# Altium PCB MIXR - Power.PcbDoc (part 4 of 4)
Units mm, origin at the board's own origin, x right, y up, seen from the top; angles counter-clockwise.
Board outline 109.43 x 109.43 mm, 2 copper layers (Top Layer, Bottom Layer), stack 1.569 mm thick; 131 components, 82 nets, 420 pads, 247 vias.
Unrouted connection lines stored in the file: 102.
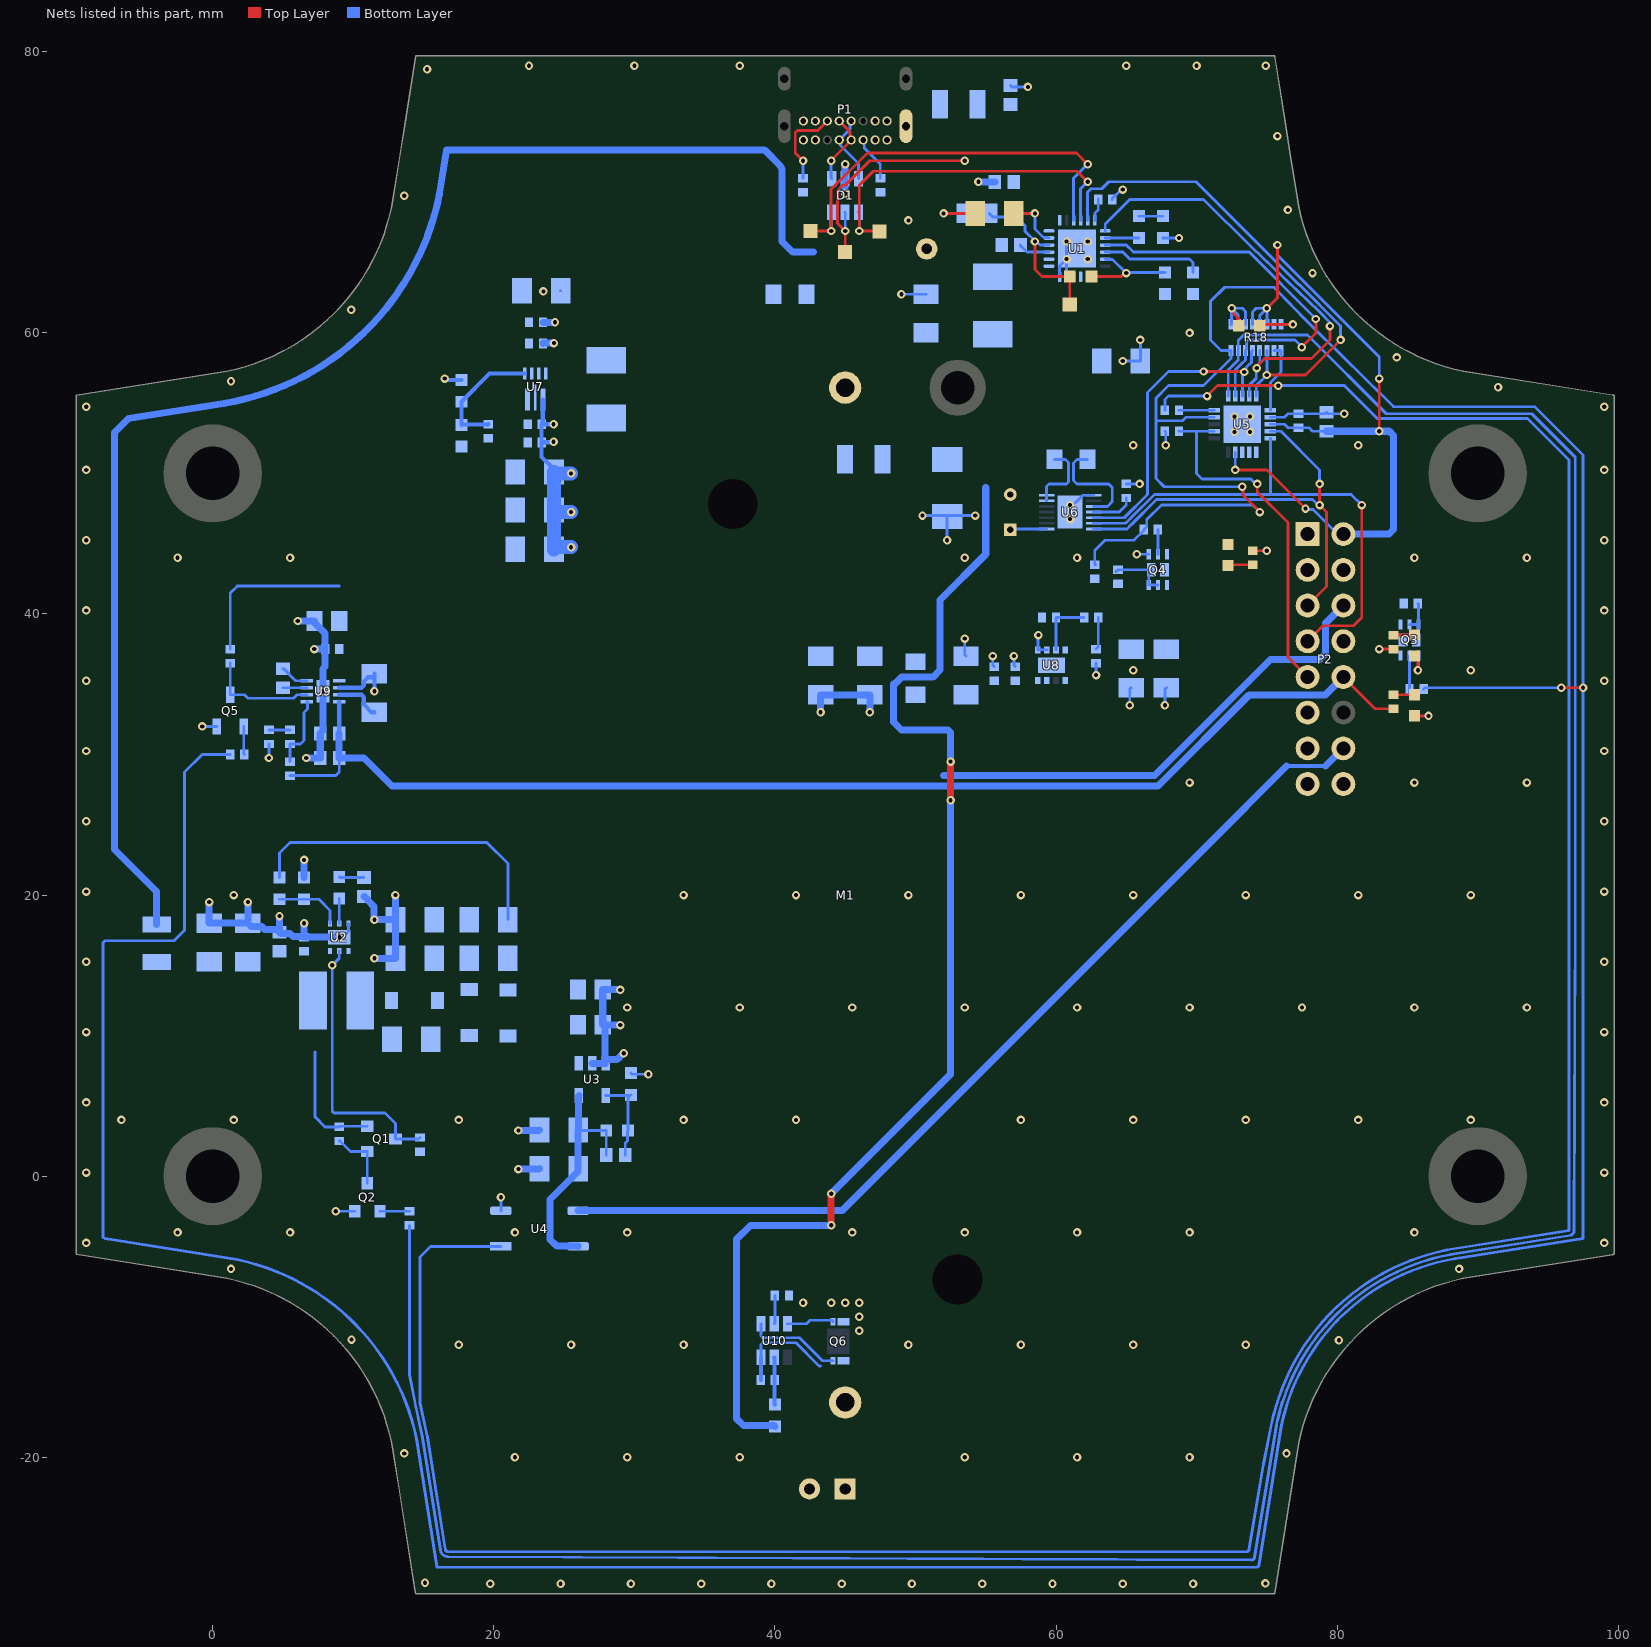
[diagram p2: the nets of this part, all layers, seen from the top]

## Keep-outs (continued)
Keep-Out Layer: (continued)
  lines w0.2: 99.713,55.548 99.712,55.548 99.711,55.549 99.71,55.549 99.709,55.55 ; 99.713,55.548 99.713,-5.549 99.712,-5.549 99.711,-5.55 99.71,-5.55 99.709,-5.55 99.708,-5.551 99.706,-5.551 99.705,-5.552 99.704,-5.552 99.703,-5.553 99.702,-5.553 99.701,-5.553 99.699,-5.554 99.698,-5.554 99.697,-5.555 99.696,-5.555 99.695,-5.555 99.694,-5.556 ; 75.551,79.706 75.551,79.707 75.55,79.708 75.55,79.709 75.549,79.71 75.549,79.712 75.548,79.713 48.95,79.712 41.05,79.712 14.452,79.712 13.654,74.757 13.324,72.672 12.847,69.662 cw(c-2.016,72.016) 0.338,57.153 -9.713,55.548 -9.713,-5.549 0.338,-7.154 cw(c-2.016,-22.017) 12.847,-19.663 13.324,-22.672 14.42,-29.594 75.568,-29.594 77.153,-19.663 cw(c92.016,-22.017) 89.662,-7.154 99.594,-5.581 99.595,-5.58 99.596,-5.58 99.598,-5.58 99.599,-5.58 99.6,-5.58 99.601,-5.579 99.602,-5.579 99.604,-5.579 99.605,-5.579 99.606,-5.579 99.607,-5.578 99.609,-5.578 ; 75.551,79.706 75.551,79.705 ; 75.551,79.705 75.552,79.703 75.552,79.702 75.553,79.701 75.553,79.7 75.554,79.699 75.554,79.698 75.554,79.696 75.555,79.695 75.555,79.694 75.556,79.693 75.556,79.692 ; 75.556,79.692 75.556,79.691 ; 75.556,79.691 75.557,79.689 75.557,79.688 75.558,79.687 75.558,79.686 75.558,79.685 75.559,79.683 75.559,79.682 75.56,79.681 75.56,79.68 75.56,79.679 75.561,79.678 75.561,79.676 75.561,79.675 ; 75.561,79.675 75.562,79.674 ; 75.562,79.674 75.562,79.673 75.562,79.672 75.563,79.67 75.563,79.669 75.563,79.668 75.564,79.667 75.564,79.666 75.565,79.665 75.565,79.663 75.565,79.662 75.566,79.661 75.566,79.66 75.566,79.659 75.567,79.657 75.567,79.656 ; 75.567,79.656 75.567,79.655 ; 75.567,79.655 75.567,79.654 75.568,79.653 75.568,79.651 75.568,79.65 75.569,79.649 75.569,79.648 75.569,79.647 75.57,79.645 75.57,79.644 75.57,79.643 75.571,79.642 75.571,79.641 75.571,79.639 75.571,79.638 75.572,79.637 75.572,79.636 75.572,79.635 75.573,79.633 ; 75.573,79.633 75.573,79.632 ; 75.573,79.632 75.573,79.631 75.573,79.63 75.574,79.628 75.574,79.627 75.574,79.626 75.574,79.625 75.575,79.624 75.575,79.622 75.575,79.621 75.575,79.62 75.576,79.619 75.576,79.618 75.576,79.616 75.576,79.615 75.577,79.614 75.577,79.613 75.577,79.612 75.577,79.61 75.578,79.609 75.578,79.608 75.578,79.607 ; 75.578,79.607 75.578,79.605 ; 75.578,79.605 75.579,79.604 75.579,79.603 75.579,79.602 75.579,79.601 75.579,79.599 75.58,79.598 75.58,79.597 75.58,79.596 75.58,79.594 75.58,79.593 76.346,74.757 76.677,72.672 77.153,69.662 ccw(c92.016,72.016) 89.662,57.153 99.594,55.58 99.595,55.579 99.596,55.579 99.598,55.579 99.599,55.579 99.6,55.579 99.601,55.578 99.602,55.578 99.604,55.578 99.605,55.578 99.606,55.578 99.607,55.577 99.609,55.577 99.61,55.577 99.611,55.577 99.612,55.576 99.613,55.576 99.615,55.576 99.616,55.576 99.617,55.576 99.618,55.575 99.62,55.575 99.621,55.575 99.622,55.575 99.623,55.574 99.624,55.574 99.626,55.574 99.627,55.574 99.628,55.573 99.629,55.573 99.63,55.573 99.632,55.572 99.633,55.572 99.634,55.572 99.635,55.572 ; 99.61,-5.578 99.611,-5.578 99.612,-5.577 99.613,-5.577 99.615,-5.577 99.616,-5.577 99.617,-5.576 99.618,-5.576 99.62,-5.576 99.621,-5.576 99.622,-5.575 99.623,-5.575 99.624,-5.575 99.626,-5.575 99.627,-5.574 99.628,-5.574 99.629,-5.574 99.63,-5.574 99.632,-5.573 99.633,-5.573 99.634,-5.573 99.635,-5.573 99.636,-5.572 99.638,-5.572 99.639,-5.572 99.64,-5.571 99.641,-5.571 99.642,-5.571 99.644,-5.57 99.645,-5.57 99.646,-5.57 99.647,-5.57 99.648,-5.569 99.65,-5.569 99.651,-5.569 99.652,-5.568 99.653,-5.568 99.654,-5.568 99.656,-5.567 99.657,-5.567 99.658,-5.567 ; 99.609,-5.578 99.61,-5.578 ; 99.635,55.572 99.636,55.571 ; 99.636,55.571 99.638,55.571 99.639,55.571 99.64,55.57 99.641,55.57 99.642,55.57 99.644,55.57 99.645,55.569 99.646,55.569 99.647,55.569 99.648,55.568 99.65,55.568 99.651,55.568 99.652,55.567 99.653,55.567 99.654,55.567 99.656,55.567 99.657,55.566 99.658,55.566 99.659,55.565 99.66,55.565 99.662,55.565 99.663,55.565 99.664,55.564 99.665,55.564 99.666,55.564 99.668,55.563 99.669,55.563 99.67,55.562 99.671,55.562 99.672,55.562 99.674,55.561 99.675,55.561 99.676,55.561 99.677,55.56 99.678,55.56 99.679,55.56 99.681,55.559 99.682,55.559 99.683,55.558 99.684,55.558 99.685,55.558 99.687,55.557 99.688,55.557 99.689,55.557 99.69,55.556 99.691,55.556 99.692,55.555 ; 99.659,-5.566 99.66,-5.566 99.662,-5.566 99.663,-5.565 99.664,-5.565 99.665,-5.565 99.666,-5.564 99.668,-5.564 99.669,-5.564 99.67,-5.563 99.671,-5.563 99.672,-5.563 99.674,-5.562 99.675,-5.562 99.676,-5.562 ; 99.658,-5.567 99.659,-5.566 ; 99.677,-5.561 99.678,-5.561 99.679,-5.56 99.681,-5.56 99.682,-5.56 99.683,-5.559 99.684,-5.559 99.685,-5.559 99.687,-5.558 99.688,-5.558 99.689,-5.557 99.69,-5.557 99.691,-5.557 99.692,-5.556 ; 99.676,-5.562 99.677,-5.561 ; 99.692,-5.556 99.694,-5.556 ; 99.692,55.555 99.694,55.555 ; 99.694,55.555 99.695,55.555 99.696,55.554 99.697,55.554 99.698,55.553 99.699,55.553 99.701,55.552 99.702,55.552 99.703,55.552 99.704,55.551 99.705,55.551 99.706,55.55 99.708,55.55 ; 99.708,55.55 99.709,55.55

## Other copper
Bottom Layer:
  pour cut-out: 12,35 12,34 10,34 10,35
  text "20/02 T.Li" at 23.15,77.475 h0.8

## Silkscreen, mask and mechanical layers (free items; w line width, h text height)
Top Overlay:
  drawing of 5 lines, arcs and shapes, not listed
  text "E" at 21.754,67.957 h10
  text "POWER BOARD / REV 1.0" at 64.929,12.288 h0.8
Top Solder:
  lines w1.25: -9.225,-5.086 -9.225,55.082 0.281,56.588 ; -9.2,-5.122 1.263,-6.793 ; 0.275,56.625 ccw(c-1.907,71.856) 13.087,68.402 ; 1.598,-6.889 cw(c-1.856,-21.883) 13.375,-19.701 ; 13.183,68.737 14.853,79.2 75.101,79.2 76.844,68.285 ; 13.412,-19.695 14.918,-29.201 ; 14.884,-29.2 73.513,-29.2 75.025,-29.2 ; 75.082,-29.201 76.588,-19.695 ; 76.625,-19.701 cw(c91.856,-21.883) 88.402,-6.889 ; 76.894,68.335 ccw(c91.972,71.994) 89.014,56.763 ; 88.737,-6.793 99.2,-5.122 99.2,55.14 93.773,55.999 89.006,56.754
Bottom Solder:
  lines w1.25: -9.225,-5.086 -9.225,55.082 0.281,56.588 ; -9.2,-5.122 1.263,-6.793 ; 0.275,56.625 ccw(c-1.907,71.856) 13.087,68.402 ; 1.598,-6.889 cw(c-1.856,-21.883) 13.375,-19.701 ; 13.183,68.737 14.853,79.2 75.101,79.2 76.844,68.285 ; 13.412,-19.695 14.918,-29.201 ; 14.884,-29.2 73.513,-29.2 75.025,-29.2 ; 75.082,-29.201 76.588,-19.695 ; 76.625,-19.701 cw(c91.856,-21.883) 88.402,-6.889 ; 76.894,68.335 ccw(c91.972,71.994) 89.014,56.763 ; 88.737,-6.793 99.2,-5.122 99.2,55.14 93.773,55.999 89.006,56.754
Mechanical 7:
  drawing of 324 lines, arcs and shapes, not listed

## Text inside footprints (layer, text, board x,y; h text height)
M1: Top Overlay "+" at 47.483,60.025 h5 r90; Top Overlay "-" at 43.325,-17.101 h5 r180
P1: Mechanical 16 ">PCB Edge" at 39.3,79.825 h1.57 r180